# Altium PCB VYLT_IOT_HAT_DEMO.PcbDoc
Units mm, origin at the board's own origin, x right, y up, seen from the top; angles counter-clockwise.
Board outline 137.1 x 87.1 mm, 4 copper layers (L1, L2, L3, L4), stack 1.545 mm thick; 6 components, 36 nets, 36 pads, 1 vias.
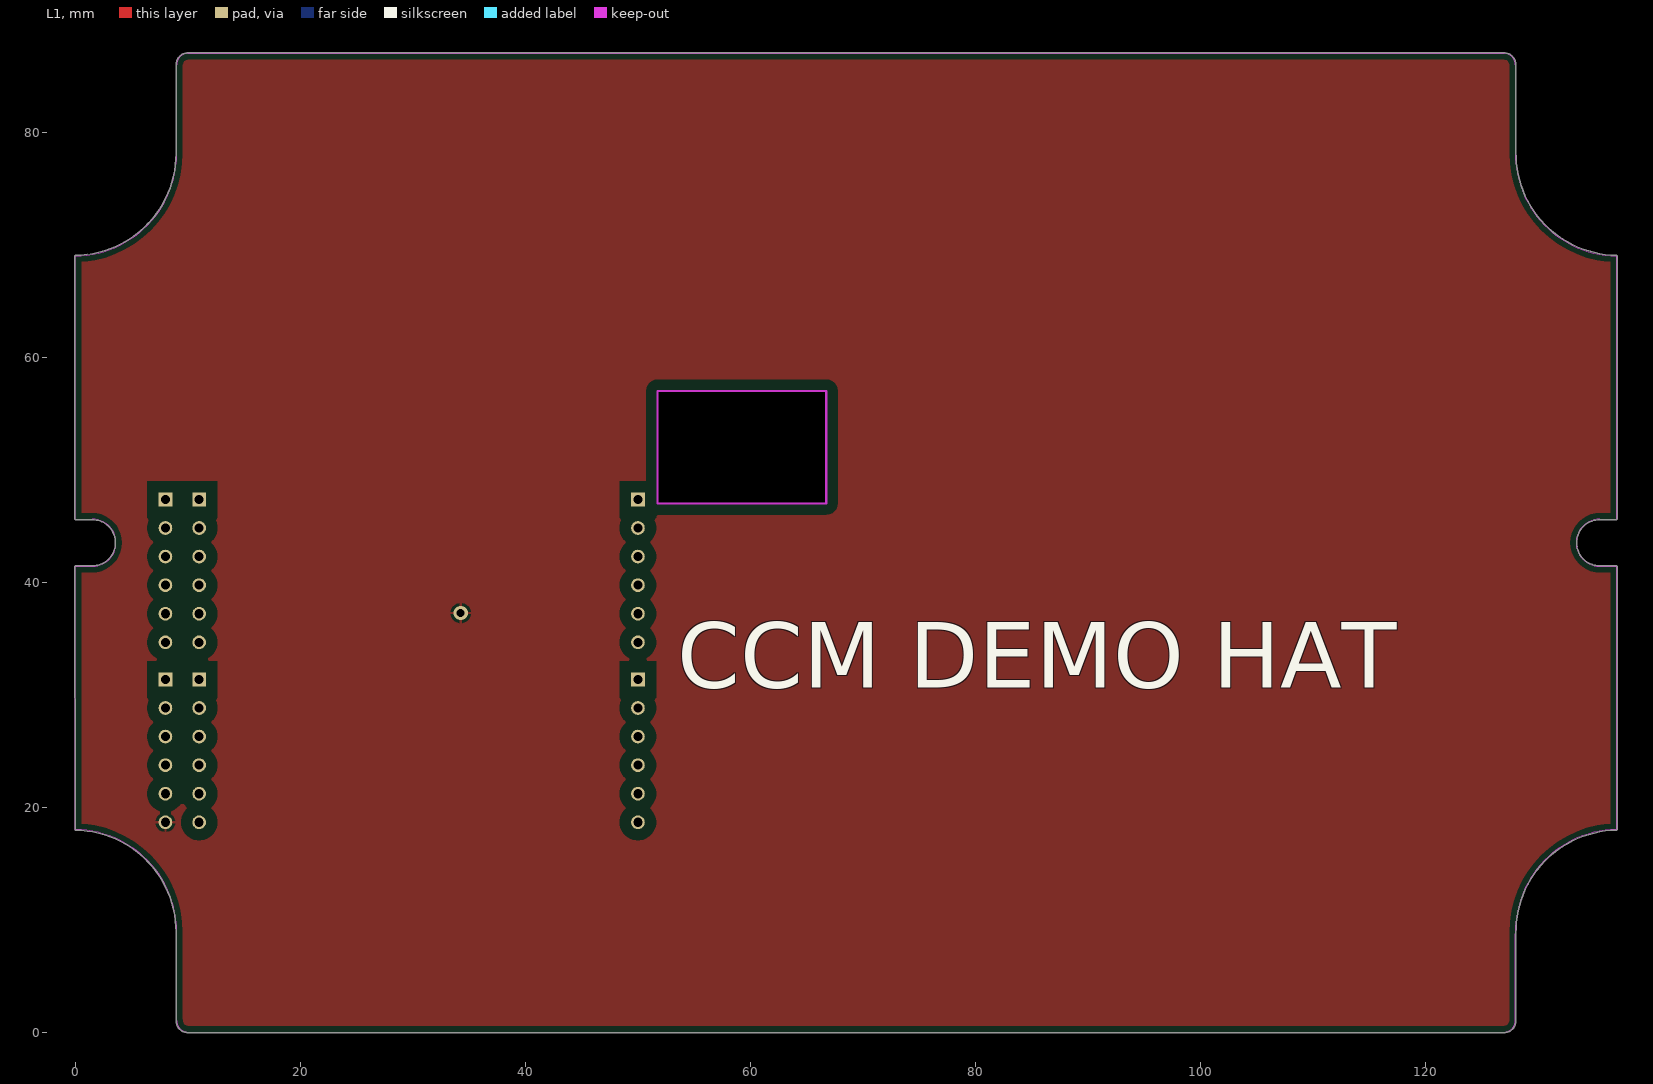
[diagram p0: L1 view]
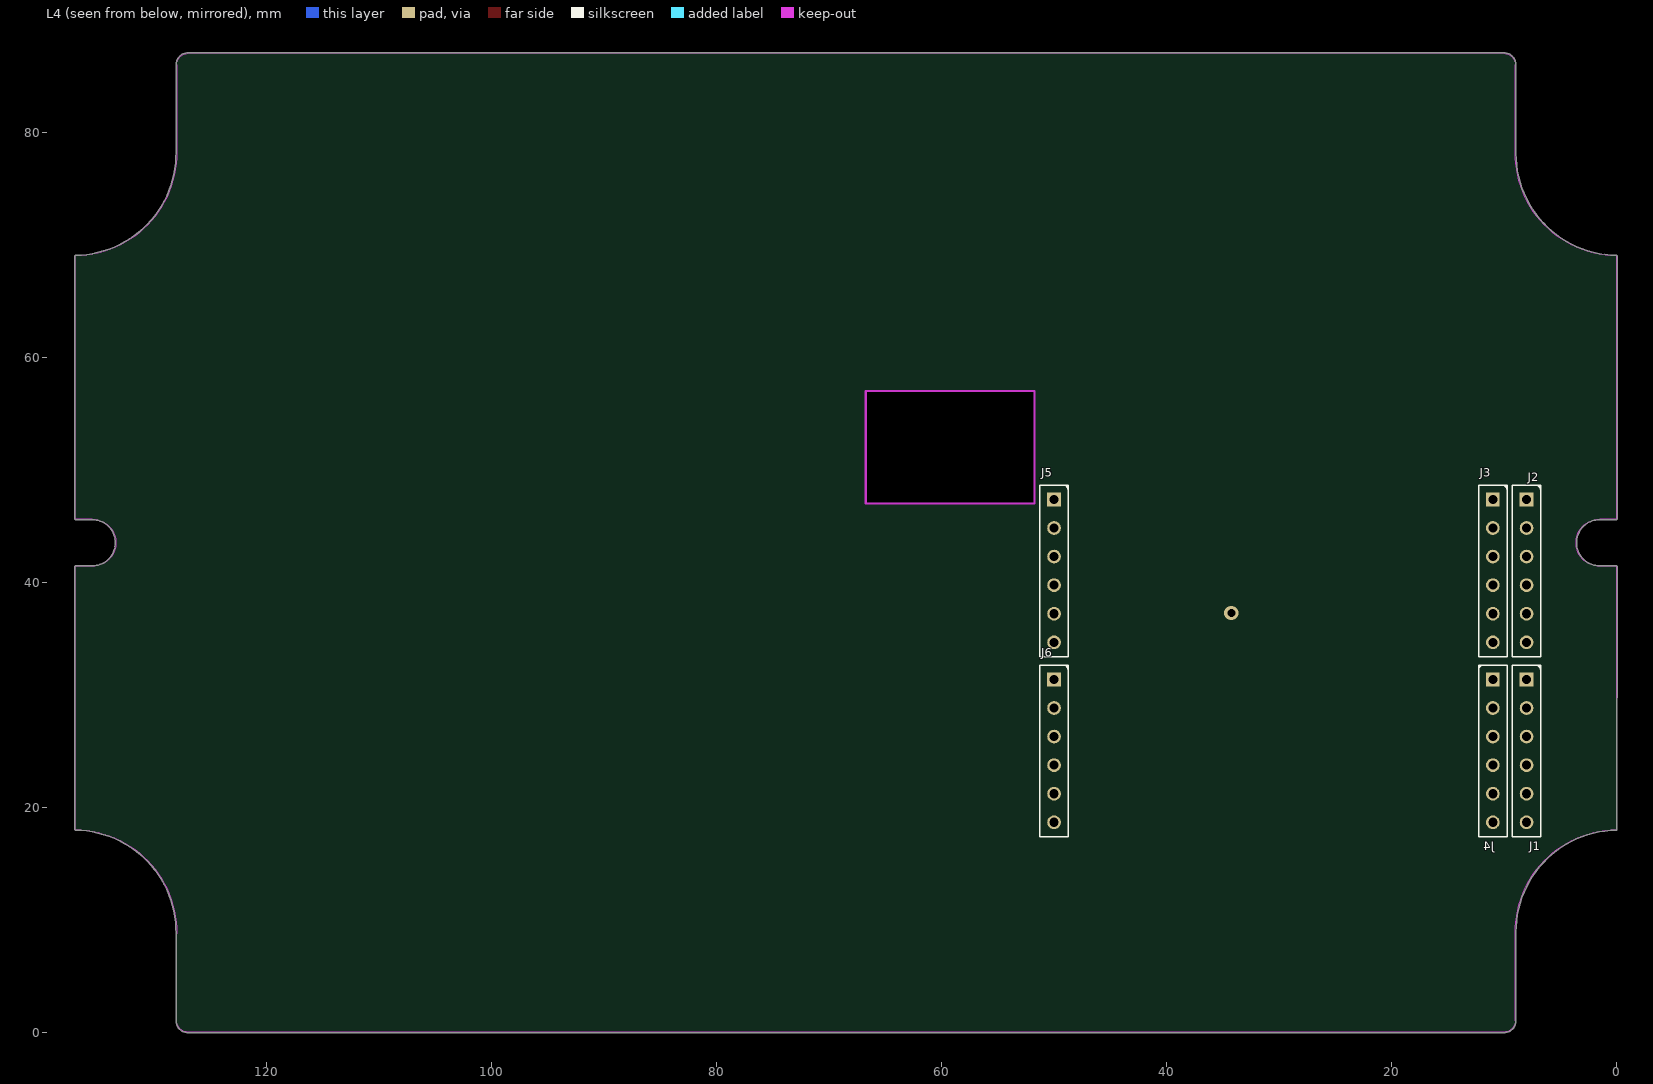
[diagram p1: L4 view, seen from below]

## Layer stack, top to bottom
Top Solder: solder mask 0.01, Solder Resist, Dk 3.5
L1: signal copper 0.035
Dielectric 1: prepreg 0.12, PP-024, Dk 4.5
L2: signal copper 0.035
Core: core 1.165, Core-044, Dk 4
L3: signal copper 0.035
Dielectric 2: prepreg 0.12, PP-024, Dk 4.5
L4: signal copper 0.035
Bottom Solder: solder mask 0.01, Solder Resist, Dk 3.5

## Board outline
-0.004,17.95 -0.05,41.4 0,41.45 1.5,41.45 ccw(c1.5,43.5) 3.55,43.5 ccw(c1.5,43.5) 1.5,45.55 0,45.55 -0.053,45.603 -0.053,69 -0.004,69.05 ccw(c-0.126,78.123) 8.947,78.124 8.947,78.247 8.947,85.997 8.95,86.014 cw(c10,86) 10,87.05 127,87.05 cw(c127,86) 128.05,86.014 128.053,85.997 128.054,78.247 ccw(c137.126,78.123) 137.003,69.051 137.05,68.983 137.05,45.6 137,45.55 135.5,45.55 ccw(c135.5,43.5) 135.5,41.45 137,41.45 137.05,41.4 137.05,18.017 137.004,17.95 ccw(c137.126,8.877) 128.053,8.754 128.053,1.003 128.05,0.986 cw(c127,1) 127,-0.05 10,-0.05 cw(c10,1) 8.95,0.986 8.947,1.003 8.947,8.753 8.947,8.877 ccw(c-0.126,8.877)
cut-out: 51.753,57 66.75,57 66.75,47 51.753,47

## Design rules (kind name [scope] priority, off if disabled: settings)
Clearance [All] p1: gap=0.254 ignorepadtopadclearanceinfootprint=FALSE except(0.178: Track-Track Track-SMDPad SMDPad-SMDPad; 0.5: Arc-Poly Track-Poly SMDPad-Poly; 1: THPad-Poly Poly-Poly Poly-Region)
Height [All] p1: minheight=0 maxheight=55 prefheight=12.7
PolygonConnect [All] p1: connectstyle=Relief reliefconductorwidth=0.254 reliefentries=4 polygonreliefangle="90 Angle" airgapwidth=0.254
RoutingVias [All] p1: holewidth=0.711 width=1.27 viastyle="Through Hole" minholewidth=0.1 minwidth=0.1 maxholewidth=0.711 maxwidth=1.27
SolderMaskExpansion [All] p1: expansion=0.102 istentingtop=FALSE
SupplyNets "Schematic Supply Nets" [InNet('GND')] p1: voltage=0.000
Width [All] p1: maxlimit=2 minlimit=0.254 preferedwidth=0.5
29 further rules are at their usual default settings.

## Classes and differential pairs
net class J6_Nets: NetJ6_1 NetJ6_2 NetJ6_3 NetJ6_4 NetJ6_5 NetJ6_6
net class J5_Nets: NetJ5_1 NetJ5_2 NetJ5_3 NetJ5_4 NetJ5_5 NetJ5_6
net class J4_Nets: NetJ4_1 NetJ4_2 NetJ4_3 NetJ4_4 NetJ4_5 NetJ4_6
net class J3_Nets: NetJ3_1 NetJ3_2 NetJ3_3 NetJ3_4 NetJ3_5 NetJ3_6
net class J2_Nets: NetJ2_1 NetJ2_2 NetJ2_3 NetJ2_4 NetJ2_5 NetJ2_6
net class J1_Nets: GND NetJ1_1 NetJ1_2 NetJ1_3 NetJ1_4 NetJ1_5

## Components (designator, comment, footprint, x,y, rotation, side; value= is the part's Value field where it differs from the comment)
J1 "6PX1R_M" 6PX1R_M_STK20 8,25 r90 bottom
J2 "6PX1R_M" 6PX1R_M_STK20 8,41 r90 bottom
J3 "6PX1R_M" 6PX1R_M_STK20 11,41 r90 bottom
J4 "6PX1R_M" 6PX1R_M_STK20 11,25 r90 bottom locked
J5 "6PX1R_M" 6PX1R_M_STK20 50,41 r90 bottom locked
J6 "6PX1R_M" 6PX1R_M_STK20 50,25 r90 bottom locked

## Footprints (in the part's own frame and the unit in brackets; to place one, negate y for a bottom-side part, rotate by r counter-clockwise, add the part's x,y. Pads: shape width x height; smd on the part's side, far side on the other; paste and mask are expansions set on the pad)
6PX1R_M_STK20 [mm]
  rect 1.22x1.22 / inner round 1.22 / far side rect 1.22x1.22 hole 0.81: 1(6.35,0)
  round 1.22 hole 0.81: 2(3.81,0) 3(1.27,0) 4(-1.27,0) 5(-3.81,0) 6(-6.35,0)
  silkscreen extent -7.62,-1.27 7.62,1.27, body extent -7.62,-1.2 7.62,1.2, height 18.11

## Part data
J1 J2 J3 J4 J5 J6: "6PX1R Male Header"

## Via types
v1: diameter 1.27, hole 0.711, L1 to L4, 1 vias

## Nets (pads, with @x,y where several pads share a name; then routed paths per layer and width w, separated by ;. In a path a pad name is that pad's centre, name@x,y a point inside that pad or via, vN(x,y) a via of type N, cw(c..) or ccw(c..) an arc to the next point about the centre after c; other vN are vias at no path point)
GND: J1.6
  other v1: 34.25,37.25
NetJ1_1: J1.1
NetJ1_2: J1.2
NetJ1_3: J1.3
NetJ1_4: J1.4
NetJ1_5: J1.5
NetJ2_1: J2.1
NetJ2_2: J2.2
NetJ2_3: J2.3
NetJ2_4: J2.4
NetJ2_5: J2.5
NetJ2_6: J2.6
NetJ3_1: J3.1
NetJ3_2: J3.2
NetJ3_3: J3.3
NetJ3_4: J3.4
NetJ3_5: J3.5
NetJ3_6: J3.6
NetJ4_1: J4.1
NetJ4_2: J4.2
NetJ4_3: J4.3
NetJ4_4: J4.4
NetJ4_5: J4.5
NetJ4_6: J4.6
NetJ5_1: J5.1
NetJ5_2: J5.2
NetJ5_3: J5.3
NetJ5_4: J5.4
NetJ5_5: J5.5
NetJ5_6: J5.6
NetJ6_1: J6.1
NetJ6_2: J6.2
NetJ6_3: J6.3
NetJ6_4: J6.4
NetJ6_5: J6.5
NetJ6_6: J6.6

## Polygon pours and split planes (outlines as drawn)
GND on L1 "NONET_L-01_P-001" (solid, pour order 14): -0.05,17.967 -0.05,41.35 0,41.4 1.5,41.4 1.501,41.4 ccw(c1.5,43.45) 3.55,43.45 ccw(c1.5,43.45) 1.5,45.499 0,45.499 -0.053,45.553 -0.053,68.95 -0.003,69 ccw(c-0.126,78.073) 8.948,78.073 8.947,78.197 8.947,85.947 8.95,85.964 cw(c10,85.95) 10,87 127,87 127.001,87 cw(c127,85.95) 128.051,85.964 128.054,85.947 128.054,78.196 ccw(c137.126,78.073) 137.004,69 137.051,68.932 137.051,45.55 137,45.499 135.5,45.499 ccw(c135.5,43.45) 135.5,41.4 137,41.4 137.051,41.35 137.051,17.967 137.004,17.899 ccw(c137.127,8.826) 128.054,8.703 128.054,0.953 128.051,0.935 cw(c127,0.95) 127,-0.101 10,-0.101 cw(c10,0.95) 8.95,0.935 8.947,0.953 8.947,8.703 8.948,8.826 ccw(c-0.126,8.826)

## Keep-outs
Keep-Out Layer:
  lines w0.1: -0.003,18 cw(c-0.126,8.877) 8.997,8.753 8.997,1.003 ; -0.003,45.603 -0.003,69 ccw(c-0.126,78.124) 8.997,78.247 8.997,85.997 ; 0,18.003 0,41.4 1.5,41.4 ccw(c1.5,43.5) 1.5,45.6 0,45.6 ; 9,1 ccw(c10,1) 10,0 127,0 ccw(c127,1) 128,1 ; 9,86 cw(c10,86) 10,87 127,87 cw(c127,86) 128,86 ; 128.003,1.003 128.003,8.753 cw(c137.126,8.877) 137.003,18 ; 128.003,85.997 128.003,78.247 ccw(c137.126,78.123) 137.003,69 ; 137,18.003 137,41.4 135.5,41.4 cw(c135.5,43.5) 135.5,45.6 137,45.6 137,68.998 ; 137.003,69 137.003,69
  lines w0.2: 51.75,47 66.75,47 66.75,57 51.75,57 51.75,50.375 51.75,47

## Silkscreen, mask and mechanical layers (free items; w line width, h text height)
Top Overlay:
  text "CCM DEMO HAT" at 53.497,28.713 h10
Dimensions:
  lines w0.1: 0,0 0,0